# Altium PCB O_Flicker_V01_D0506.PcbDoc
Units mil, origin at the board's own origin, x right, y up, seen from the top; angles counter-clockwise.
Board outline 4527.56 x 3543.31 mil, 2 copper layers (Top Layer, Bottom Layer); 96 components, 75 nets, 276 pads, 3 vias.
Unrouted connection lines stored in the file: 146.
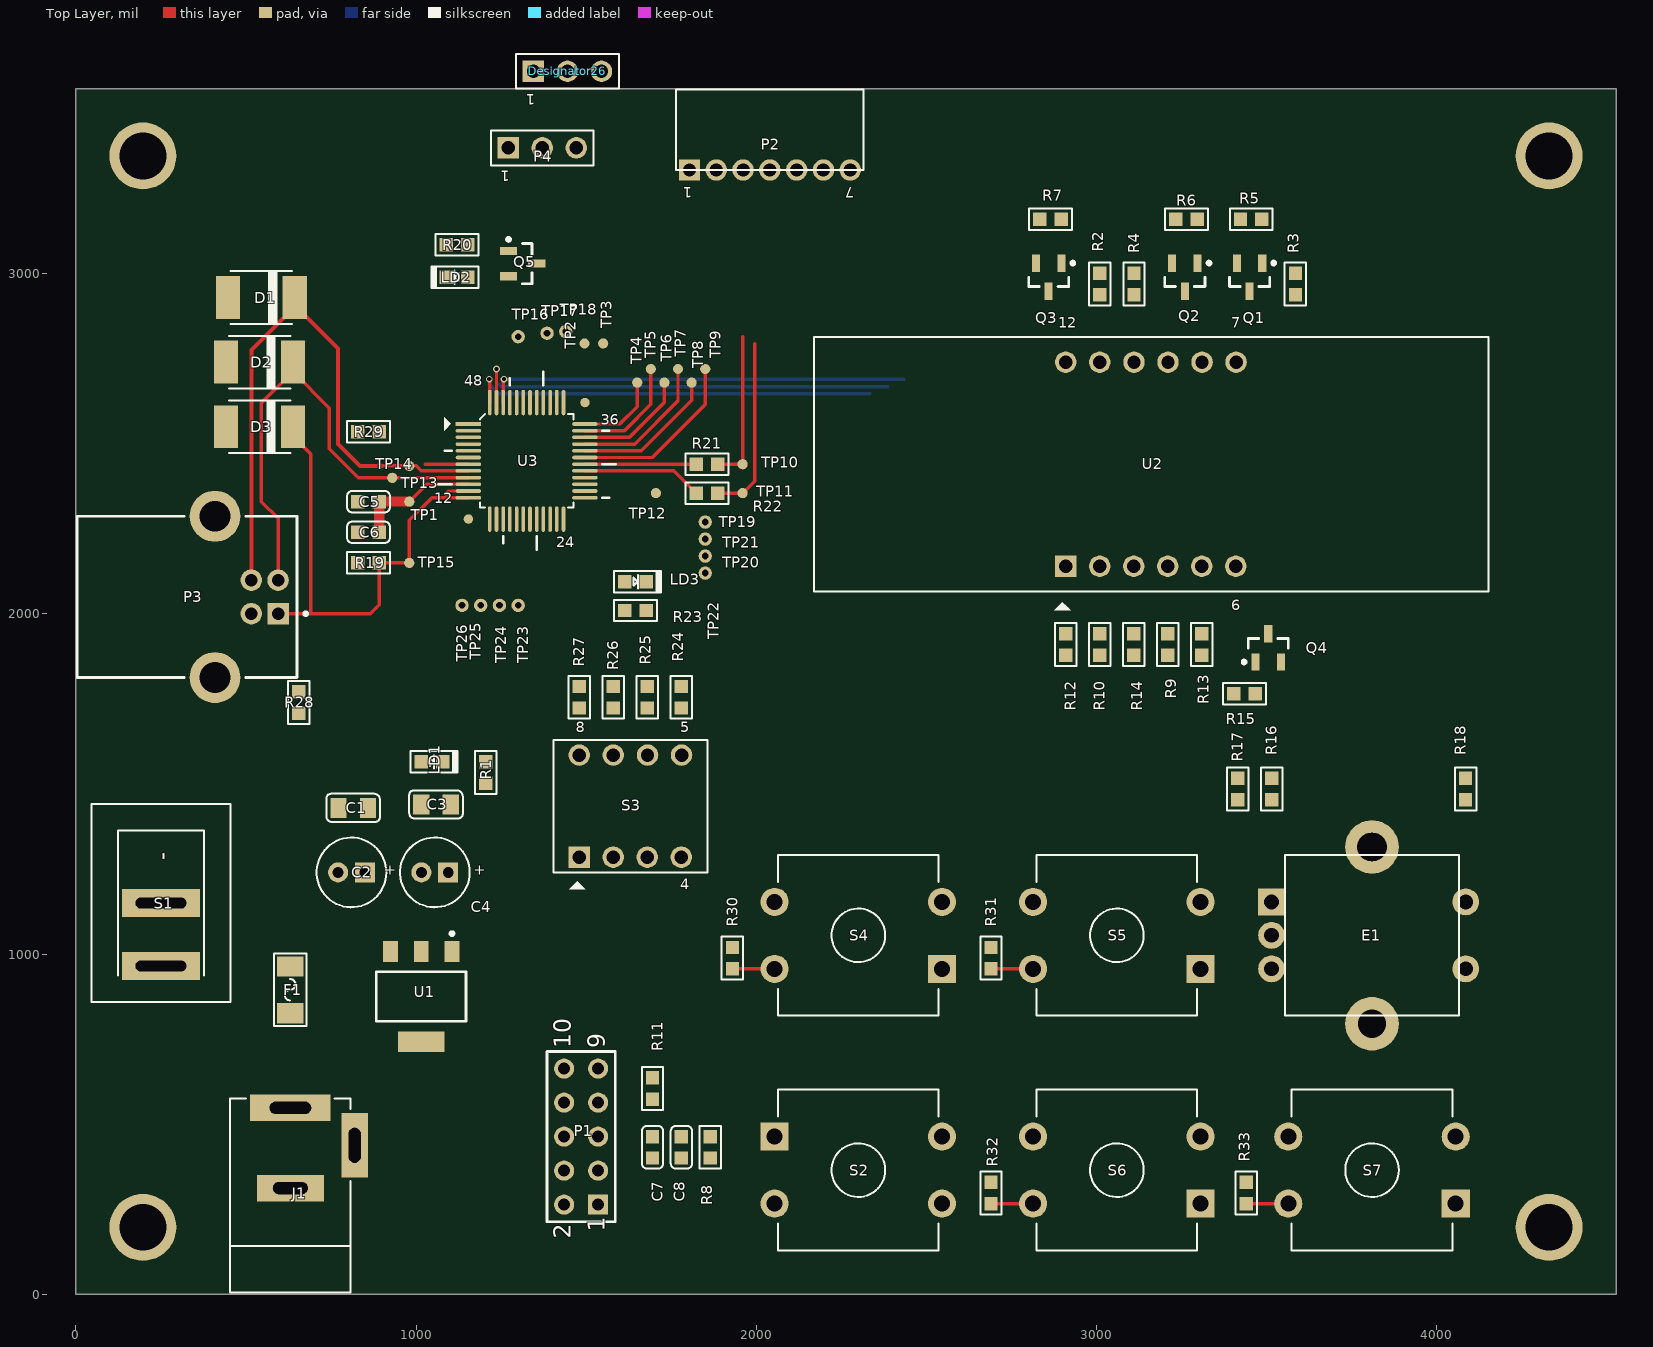
[diagram p0: Top Layer view]
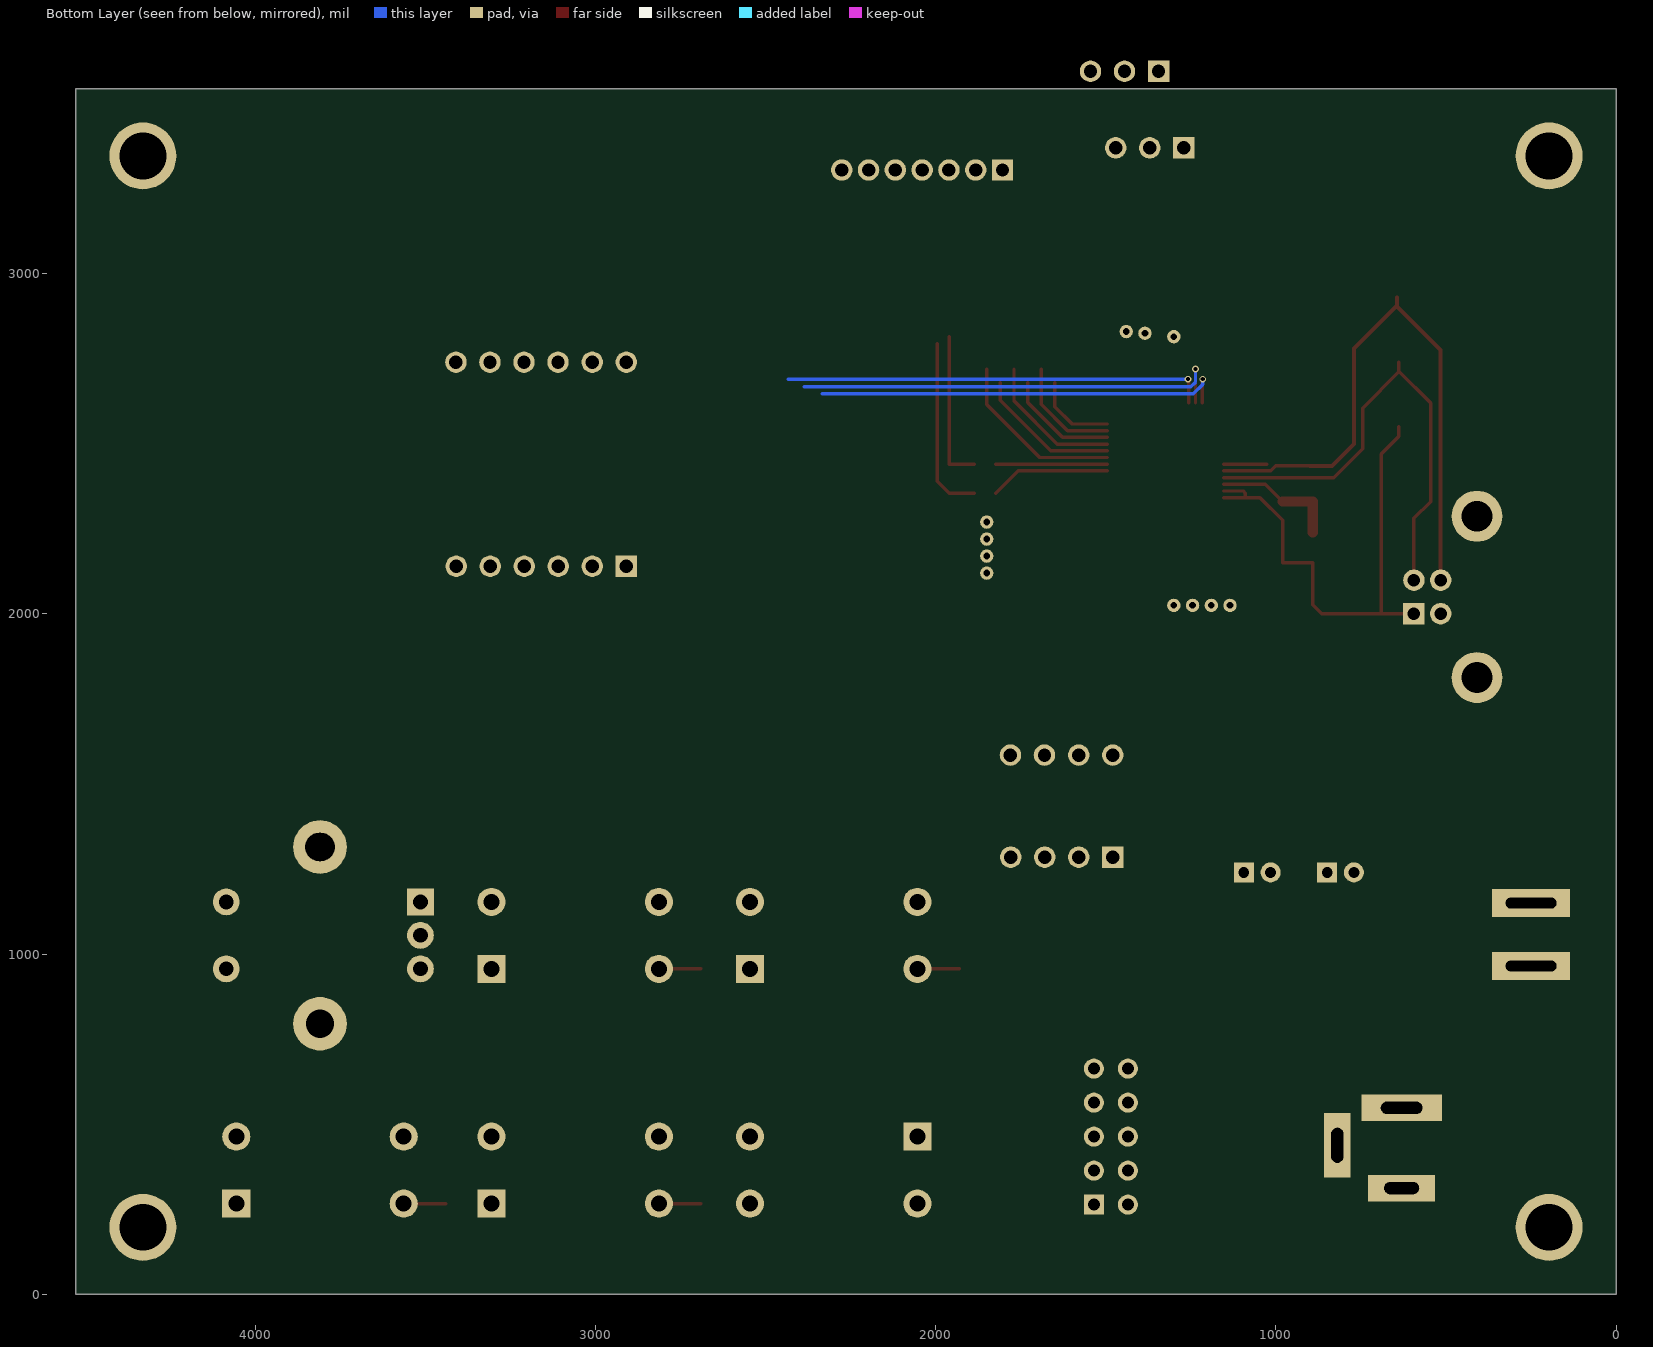
[diagram p1: Bottom Layer view, seen from below]

## Layer stack, top to bottom
Top Layer: signal copper 1.4
Dielectric: dielectric 12.6, FR-4, Dk 4.8
Bottom Layer: signal copper 1.4

## Board outline
0,0 4527.56,0 4527.56,3543.31 0,3543.31

## Design rules (kind name [scope] priority, off if disabled: settings)
Clearance [All] p1: gap=6
ComponentClearance [All] p1 off: gap=10 collisioncheckmode=3 verticalgap=10 showdistances=FALSE
FabricationTestPointUsage TestPointUsage [All] p1: valid=0 allowmultiple=FALSE
FabricationTestpoint Testpoint [(IsPad And (OnTopLayer Or OnBottomLayer))] p1: side=3 testpointundercomponent=TRUE minsize=40 maxsize=100 preferedsize=60 minholesize=0 maxholesize=40 preferedholesize=32 testpointgrid=1 allowsidetop=TRUE allowsidebottom=TRUE usegrid=TRUE gridtolerance=0.01
Height [All] p1 off: minheight=0 maxheight=1000 prefheight=500
HoleSize [All] p1: absolutevalues=TRUE maxlimit=400 minlimit=1 maxpercent=80.000 minpercent=20.000
PolygonConnect PolygonConnect_1 [IsVia or IsSMTPin] p1: connectstyle=Direct reliefconductorwidth=10 reliefentries=4 polygonreliefangle="90 Angle"
PolygonConnect [All] p2: connectstyle=Relief reliefconductorwidth=20 reliefentries=4 polygonreliefangle="90 Angle"
RoutingVias [All] p1: holewidth=30 width=40 viastyle="Through Hole" minholewidth=12 minwidth=20 maxholewidth=20 maxwidth=30
SilkscreenOverComponentPads [All] p1: minsilkscreentomaskgap=10
SolderMaskExpansion [All] p1: expansion=4
Width [All] p1: maxlimit=80 minlimit=10 preferedwidth=12
22 further rules are at their usual default settings.

## Components (designator, comment, footprint, x,y, rotation, side; value= is the part's Value field where it differs from the comment)
C1 "Cap" C0805 815,1430 r180 top
C2 "47uF/16V" CAP-5*2 810,1240 r180 top
C3 "Cap" C0805 1058.5,1440 r180 top
C4 "47uF/16V" CAP-5*2 1055,1240 r180 top
C5 "Cap Semi" C0603 860,2330 r180 top
C6 "Cap Semi" C0603 860,2240 r180 top
C7 "Cap Semi" C0603 1695,432 r90 top
C8 "Cap Semi" C0603 1780,432 r90 top
D1 "Diode" DO-214AA 545,2930 r0 top
D2 "Diode" DO-214AA 540,2740 r0 top
D3 "Diode" DO-214AA 540,2550 r0 top
Designator26 "Comment" CH3P\2.54-V 1445,3595 r180 top
E1 "DC12K24214" DC12K24214 3810,1055 r270 top
F1 "Fuse 2" F1206 630,895 r90 top
J1 "DC JACK 3P/2mm" DC-JACK 725,430 r0 top
LD1 "LED2" D0603 1046.5,1565 r0 top
LD2 "LED2" D0603 1120,2990 r180 top
LD3 "LED2" D0603 1645,2095 r0 top
P1 "Header 5X2H" HDR2X5 1535,263.5 r90 top
P2 "I2C" CH7P\2.0-H 2040,3305 r180 top
P3 "440119-1" 440119 555,2050 r180 top
P4 "Sensor" CH3P\2.54-V 1371,3370 r180 top
Q1 "MMBT3906" SOT23_N 3450,2990 r270 top
Q2 "MMBT3906" SOT23_N 3260,2990 r270 top
Q3 "MMBT3906" SOT23_N 2859.61,2990 r270 top
Q4 "MMBT3906" SOT23_N 3505,1900 r90 top
Q5 "2N7002" SOT23_N 1313,3030 r0 top
R1 "Res3" R0603 1205,1533.5 r90 top
R2 "Res3" R0603 3009.61,2970 r270 top
R3 "Res3" R0603 3585,2970 r270 top
R4 "Res3" R0603 3110.39,2970 r270 top
R5 "Res3" R0603 3455,3160 r0 top
R6 "Res3" R0603 3265,3160 r0 top
R7 "Res3" R0603 2865,3160 r0 top
R8 "Res3" R0603 1865,432 r270 top
R9 "Res3" R0603 3209.61,1910 r90 top
R10 "Res3" R0603 3009.61,1910 r90 top
R11 "Res3" R0603 1695,605 r90 top
R12 "Res3" R0603 2909.61,1910 r90 top
R13 "Res3" R0603 3309.61,1910 r90 top
R14 "Res3" R0603 3109.61,1910 r90 top
R15 "Res3" R0603 3435,1765 r0 top
R16 "Res3" R0603 3515,1485 r90 top
R17 "Res3" R0603 3415,1485 r90 top
R18 "Res3" R0603 4085,1485 r90 top
R19 "Res3" R0603 860,2150 r0 top
R20 "Res3" R0603 1120,3085 r0 top
R21 "Res3" R0603 1855,2440 r0 top
R22 "Res3" R0603 1855,2355 r0 top
R23 "Res3" R0603 1645,2010 r0 top
R24 "Res3" R0603 1780,1755 r90 top
R25 "Res3" R0603 1680,1755 r90 top
R26 "Res3" R0603 1580,1755 r90 top
R27 "Res3" R0603 1480,1755 r270 top
R28 "Res3" R0603 655,1740 r270 top
R29 "Res3" R0603 860,2535 r0 top
R30 "Res3" R0603 1930,988 r90 top
R31 "Res3" R0603 2690,988 r90 top
R32 "Res3" R0603 2690,298 r90 top
R33 "Res3" R0603 3440,298 r90 top
S1 "SW-SPST" SW-2P 250,1150 r270 top
S2 "SW-PB" SW-DIP4P-1 2300,365 r0 top
S3 "SW-DIP4" SW-8P\11.52*9.9 1630,1435 r0 top
S4 "SW-PB" SW-DIP4P-1 2300,1055 r180 top
S5 "SW-PB" SW-DIP4P-1 3060,1055 r180 top
S6 "SW-PB" SW-DIP4P-1 3060,365 r180 top
S7 "SW-PB" SW-DIP4P-1 3810,365 r180 top
TP1 "TP" TP30#1 1010,2330 r180 top
TP2 "TP" TP30#2 1495,2795 r180 top
TP3 "TP" TP30#2 1550,2795 r180 top
TP4 "TP" TP30#2 1650,2680 r180 top
TP5 "TP" TP30#3 1685,2720 r180 top
TP6 "TP" TP30#2 1730,2680 r180 top
TP7 "TP" TP30#2 1770,2720 r180 top
TP8 "TP" TP30#2 1810,2680 r180 top
TP9 "TP" TP30#2 1850,2720 r180 top
TP10 "TP" TP30#2 1960,2440 r180 top
TP11 "TP" TP30#2 1960,2355 r180 top
TP12 "TP" TP30#2 1705,2355 r180 top
TP13 "TP" TP30#2 930,2400 r180 top
TP14 "TP" TP30#1 1010,2435 r180 top
TP15 "TP" TP30#2 980,2150 r180 top
TP16 "TP" TP1 1300,2815 r180 top
TP17 "TP" TP1 1385,2825 r180 top
TP18 "TP" TP1 1440,2830 r180 top
TP19 "TP" TP1 1850,2270 r180 top
TP20 "TP" TP1 1850,2170 r180 top
TP21 "TP" TP1 1850,2220 r180 top
TP22 "TP" TP1 1850,2120 r180 top
TP23 "TP" TP1 1300,2025 r180 top
TP24 "TP" TP1 1245,2025 r180 top (schematic designator TP25)
TP25 "TP" TP1 1190,2025 r180 top
TP26 "TP" TP1 1135,2025 r180 top
U1 "LM1117-3.3" ZZ311 1015,875 r180 top
U2 "4-7SEG" SW-12P\50*19 3160,2440 r0 top
U3 "C8051F340" TQFP-48 1325,2450 r0 top

## Footprints (in the part's own frame and the unit in brackets; to place one, negate y for a bottom-side part, rotate by r counter-clockwise, add the part's x,y. Pads: shape width x height; smd on the part's side, far side on the other; paste and mask are expansions set on the pad)
440119 [mm] "Connector; USB1.1, Type B, Thru-Hole; 4 Position; Right Angle"
  rect 1.6x1.6 hole 0.92: 1(-1,1.25)
  round 1.6 hole 0.92: 2(-1,-1.25) 3(1,-1.25) 4(1,1.25)
  round 3.8 hole 2.3: 5(3.71,6.02) 6(3.71,-6.02)
  silkscreen extent -3.18,-6.02 13.99,6.02
C0603 [mm]
  rect 1x1 smd: 1(-0.8,0) 2(0.8,0)
  silkscreen extent -1.6,-0.8 1.6,0.8
C0805 [mm]
  rect 1.2x1.5 smd: 1(-1.1,0) 2(1.1,0)
  silkscreen extent -2,-1.05 2,1.05
CAP-5*2 [mm]
  rect 1.5x1.5 hole 0.8: 1(-1,0)
  round 1.5 hole 0.8: 2(1,0)
  silkscreen extent -2.6,-2.6 2.6,2.6
CH3P\2.54-V [mm]
  rect 1.6x1.6 hole 1: 1(2.54,0)
  round 1.6 hole 1: 2(0,0) 3(-2.54,0)
  silkscreen extent -3.84,-1.3 3.84,1.3
CH7P\2.0-H [mm]
  rect 1.6x1.6 hole 1: 1(6,0)
  round 1.6 hole 1: 2(4,0) 3(2,0) 4(0,0) 5(-2,0) 6(-4,0) 7(-6,0)
  silkscreen extent -7,-6 7,0
D0603 [mm]
  rect 1x1 smd: 1(-0.8,0) 2(0.8,0)
  silkscreen extent -1.6,-0.8 1.9,0.8
DC12K24214 [mm]
  round 4 hole 2.1 slot 2.2 at 90 deg: 0(-6.6,0)
  round 4 hole 2.1: 0(6.6,0)
  rect 2x2 hole 1.1: 1(-2.5,-7.5)
  round 2 hole 1.1: 2(0,-7.5) 3(2.5,-7.5) 4(-2.5,7) 5(2.5,7)
  silkscreen extent -6,-6.5 6,6.5
DC-JACK [mm]
  rect 6x2 hole 0.9 slot 3.1 at 0 deg: 1(-2.4,3)
  rect 2x4.8 hole 0.9 slot 2.6 at 90 deg: 2(2.4,0.2)
  rect 5x2 hole 0.9 slot 2.6 at 0 deg: 3(-2.4,-3)
  silkscreen extent -6.9,-10.8 2.1,3.7
DO-214AA [mm]
  rect 1.8x3.2 smd: 1(-2.5,0) 2(2.5,0)
  silkscreen extent -2.29,-1.97 2.29,2
F1206 [mm]
  rect 1.5x2 smd paste+0: 1(-1.75,0) 2(1.75,0)
  silkscreen extent -2.7,-1.2 2.7,1.2
HDR2X5 [mm] "Connector; Header; 5x2 Position"
  rect 1.5x1.5 hole 0.9: 1(0,0)
  round 1.5 hole 0.9: 2(0,2.54) 3(2.54,0) 4(2.54,2.54) 5(5.08,0) 6(5.08,2.54) 7(7.62,0) 8(7.62,2.54) 9(10.16,0) 10(10.16,2.54)
  silkscreen extent -1.27,-1.27 11.43,3.81
R0603 [mm]
  rect 1x1 smd: 1(-0.8,0) 2(0.8,0)
  silkscreen extent -1.6,-0.8 1.6,0.8
SOT23_N [mm] "SOT23, 3-Leads, Body 2.9x1.3mm, Pitch 0.95mm, Lead Span 2.3mm, IPC Medium Density"
  rect 1.3x0.6 smd: 1(-1.05,0.95) 2(-1.05,-0.95) 3(1.05,0)
  silkscreen extent -1.17,-1.5 0.7,1.93, body extent -0.7,-1.5 0.7,1.5, height 1.1
SW-2P [mm]
  rect 2.1x5.8 hole 0.8 slot 3.8 at 90 deg: 1(4.7,0) 2(0,0)
  silkscreen extent -7.4,-5.2 7.4,5.2
SW-8P\11.52*9.9 [mm]
  rect 1.6x1.6 hole 1: 1(-3.82,-3.81)
  round 1.6 hole 1: 2(-1.28,-3.81) 3(1.26,-3.81) 4(3.8,-3.81) 5(3.82,3.81) 6(1.28,3.81) 7(-1.28,3.81) 8(-3.82,3.81)
  silkscreen extent -5.76,-6.2 5.76,4.95
SW-12P\50*19 [mm]
  rect 1.6x1.6 hole 1: 1(-6.36,-7.62)
  round 1.6 hole 1: 2(-3.82,-7.62) 3(-1.28,-7.62) 4(1.26,-7.62) 5(3.8,-7.62) 6(6.34,-7.62) 7(6.36,7.62) 8(3.82,7.62) 9(1.28,7.62) 10(-1.26,7.62) 11(-3.82,7.62) 12(-6.36,7.62)
  silkscreen extent -25.15,-10.9 25.2,9.5
SW-DIP4P-1 [mm]
  rect 2.1x2.1 hole 1.2: 1(-6.25,2.5)
  round 2.1 hole 1.2: 2(6.25,2.5) 3(-6.25,-2.5) 4(6.25,-2.5)
  silkscreen extent -6,-6 6,6
TP1 [mm]
  round 1 hole 0.5: 1(0,0)
TP30#1 [mm]
  round 0.76 smd: 1(0.762,0)
TP30#2 [mm]
  round 0.76 smd: 1(0,0)
TP30#3 [mm]
  round 0.76 smd: 1(-0.127,0)
TQFP-48 [mm] "64-Pin Thin Quad Flat Pack 0.5 mm Pitch, IPC High Density"
  rect 1.9x0.27 smd: 1(-4.35,2.75)
  oval 1.9x0.27 smd: 2(-4.35,2.25) 3(-4.35,1.75) 4(-4.35,1.25) 5(-4.35,0.75) 6(-4.35,0.25) 7(-4.35,-0.25) 8(-4.35,-0.75) 9(-4.35,-1.25) 10(-4.35,-1.75) 11(-4.35,-2.25) 12(-4.35,-2.75) 25(4.35,-2.75) 26(4.35,-2.25) 27(4.35,-1.75) 28(4.35,-1.25) 29(4.35,-0.75) 30(4.35,-0.25) 31(4.35,0.25) 32(4.35,0.75) 33(4.35,1.25) 34(4.35,1.75) 35(4.35,2.25) 36(4.35,2.75)
  oval 0.27x1.9 smd: 13(-2.75,-4.35) 14(-2.25,-4.35) 15(-1.75,-4.35) 16(-1.25,-4.35) 17(-0.75,-4.35) 18(-0.25,-4.35) 19(0.25,-4.35) 20(0.75,-4.35) 21(1.25,-4.35) 22(1.75,-4.35) 23(2.25,-4.35) 24(2.75,-4.35) 37(2.75,4.35) 38(2.25,4.35) 39(1.75,4.35) 40(1.25,4.35) 41(0.75,4.35) 42(0.25,4.35) 43(-0.25,4.35) 44(-0.75,4.35) 45(-1.25,4.35) 46(-1.75,4.35) 47(-2.25,4.35) 48(-2.75,4.35)
  round 0.7 smd mask+0.25: a(-4.35,-4.35) a(4.35,4.35)
  silkscreen extent -6.6,-6.65 6.65,6.65
ZZ311 [mm] "SOT-223/SC-73; 4 Leads; Body 6.7 x 7.3 mm, inc. leads (LxW max)"
  rect 1.1x1.55 smd: 1(-2.3,-3.375) 2(0,-3.375) 3(2.3,-3.375)
  rect 3.45x1.55 smd: 4(0,3.375)
  silkscreen extent -3.35,-4.82 3.35,1.85

## Part data
C1 C3: "Capacitor"
C2 C4: library part Cap2, "Capacitor"
C5 C6 C7 C8: "Capacitor (Semiconductor SIM Model)"
D1 D2 D3: "Default Diode"
E1: "Rotary Encoder+Push Button"
F1: "Fuse"
J1: library part PWR2.5
LD1 LD2 LD3: "Typical RED, GREEN, YELLOW, AMBER GaAs LED"
P1: "Header, 5-Pin, Dual row, Right Angle"
P2: library part S7B-PH-K-S, "Header, 7-Pin, Right Angle"
P3: "USB 1.1, Right Angle, Thru-Hole, B Type, Receptacle, 4 Position, Beige"
P4: library part S3B-PH-K-S, "Header, 7-Pin, Right Angle"
Q1 Q2 Q3 Q4: "PNP Switching Transistor"
Q5: "N-Channel Enhancement Mode Vertical DMOS FET"
R1 R2 R3 R4 R5 R6 R7 R8 R9 R10 R11 R12 R13 R14 R15 R16 R17 R18 R19 R20 R21 R22 R23 R24 R25 R26 R27 R28 R29 R30 R31 R32 R33: "Resistor"
S1: "Single-Pole, Single-Throw Switch"
S2 S4 S5 S6 S7: "Switch"
S3: "DIP Switch"
U1: "800mA and 1A Low Dropout Positive Regulator 2.85V, 3.3V, 5V, and Adjustable"
U2: library part "7-SEG LED Display", "¥"
U3: "Silicon Lab - Full Speed USB Flash MCU"

## Free pads (board coordinates)
  round 196.85 hole 137.8: 0(196.85,196.85) 0(196.85,3346.46) 0(4330.71,196.85) 0(4330.71,3346.46)

## Via types
v1: diameter 20, hole 12, Top Layer to Bottom Layer, 3 vias

## Nets (pads, with @x,y where several pads share a name; then routed paths per layer and width w, separated by ;. In a path a pad name is that pad's centre, name@x,y a point inside that pad or via, vN(x,y) a via of type N, cw(c..) or ccw(c..) an arc to the next point about the centre after c; other vN are vias at no path point)
GND: C1.1 C2.1 C3.1 C4.1 C5.2 C6.2 C7.1 C8.1 D1.1 D2.1 D3.1 E1.2 E1.5 J1.2 J1.3 P1.2 P1.3 P1.9 P2.6 P4.3 R1.1 R20.2 R23.1 R28.1 R29.1 S2.2 S3.1 S3.2 S3.3 S3.4 S4.1 S5.1 S6.1 S7.1 U1.1
NetC7_2: C7.2 C8.2 P1.5 R8.1 R11.1 S2.1
NetD3_2: D3.2 P3.1 R19.2 TP15.1 U3.11 U3.12 | length 1496.4
  Top Layer w10: P3.1 690,2000.79 ; D3.2 638.43,2521.57 690,2470 690,2000.79 ; U3.12 1090,2341.73 ; U3.11 1096.42,2361.42 1090,2355 1090,2341.73 ; 690,2000.79 865.79,2000.79 891.5,2026.5 R19.2 TP15.1 980,2275 1046.73,2341.73 1090,2341.73
NetF1_1: F1.1 J1.1
NetF1_2: F1.2 S1.1
NetLD1_2: LD1.2 R1.2
NetLD2_1: LD2.1 Q5.2
NetLD2_2: LD2.2 R20.1
NetLD3_1: LD3.1 U3.23
NetLD3_2: LD3.2 R23.2
NetP1_4: P1.4 U3.14
NetP1_7: P1.7 R11.2 U3.13
NetP3_4: P3.4 P3.5 P3.6 R28.2
NetQ1_1: Q1.1 R5.2
NetQ1_3: Q1.3 U2.8
NetQ2_1: Q2.1 R6.2
NetQ2_3: Q2.3 U2.9
NetQ3_1: Q3.1 R7.2
NetQ3_3: Q3.3 U2.12
NetQ4_1: Q4.1 R15.2
NetQ4_3: Q4.3 U2.6
NetQ5_3: Q5.3 U3.41
NetR2_1: R2.1 U3.6
NetR2_2: R2.2 U2.11
NetR3_1: R3.1 U3.5
NetR3_2: R3.2 U2.7
NetR4_1: R4.1 U3.1
NetR4_2: R4.2 U2.10
NetR5_1: R5.1 U3.45
NetR6_1: R6.1 U3.44
NetR7_1: R7.1 U3.43
NetR9_1: R9.1 U3.4
NetR9_2: R9.2 U2.4
NetR10_1: R10.1 U3.3
NetR10_2: R10.2 U2.2
NetR12_1: R12.1 U3.2
NetR12_2: R12.2 U2.1
NetR13_1: R13.1 U3.48 | length 1214.7
  Top Layer w10: U3.48 v1@1216.73,2690
  Bottom Layer w10: v1(1215,2690) 1215,2674.42 1242.42,2647 2334,2647
NetR13_2: R13.2 U2.5
NetR14_1: R14.1 U3.47 | length 1293.4
  Top Layer w10: U3.47 v1(1236.42,2720)
  Bottom Layer w10: v1(1236.42,2720) 1236.42,2681.58 1250,2668 2387,2668
NetR14_2: R14.2 U2.3
NetR15_1: R15.1 U3.46 | length 1244.7
  Top Layer w10: U3.46 v1@1256.1,2690
  Bottom Layer w10: v1(1258,2690) 2434,2690
NetR21_1: R21.1 U3.30 | length 327.3
  Top Layer w10: U3.30 1823.35,2440.16 R21.1
NetR22_1: R22.1 U3.29 | length 354.4
  Top Layer w10: U3.29 1758.03,2420.47 R22.1
NetR24_1: R24.1 S3.5 U3.22
NetR25_1: R25.1 S3.6 U3.21
NetR26_1: R26.1 S3.7 U3.20
NetR27_2: R27.2 S3.8 U3.19
NetR29_2: R29.2 U3.7 | length 127.4
  Top Layer w10: 1026.34,2440.16 U3.7
PORT1.4: TP16.1 U3.42
PORT1.6: TP17.1 U3.40
PORT1.7: TP18.1 U3.39
PORT3.2: TP19.1 U3.28
PORT3.4: TP20.1 U3.26
PORT3.5: TP21.1 U3.25
PORT3.6: TP22.1 U3.24
PORT4.4: TP23.1 U3.18
PORT4.5: TP24.1 U3.17
PORT4.6: TP25.1 U3.16
PORT4.7: TP26.1 U3.15
PRESS: E1.4 R18.1 TP5.1 U3.35 | length 329.8
  Top Layer w10: U3.35 1612.58,2538.58 1690,2616 TP5.1
ROTARY_C_CW: E1.3 R17.1 TP3.1 U3.37
ROTARY_CW: E1.1 R16.1 TP2.1 U3.38
SCL: P2.4 R22.2 TP11.1 | length 528
  Top Layer w10: R22.2 TP11.1 1995,2390 1995,2795
SDA: P2.3 R21.2 TP10.1 | length 448.5
  Top Layer w10: R21.2 TP10.1 1960,2815
SENSOR: P4.2 TP4.1 U3.36 | length 245.8
  Top Layer w10: U3.36 1599.27,2558.27 1650,2609 TP4.1
SW_DOWN: R30.1 S4.2 TP9.1 U3.31 | length 646.7
  Top Layer w10: U3.31 1694.34,2459.84 1850,2615.5 TP9.1 ; R30.1 1930.07,956.57 S4.2
SW_READ: R33.1 S7.2 TP6.1 U3.34 | length 458.7
  Top Layer w10: U3.34 1627.4,2518.9 1730,2621.5 TP6.1 ; R33.1 3440.07,266.57 S7.2
SW_UP: R31.1 S5.2 TP8.1 U3.32 | length 551.2
  Top Layer w10: U3.32 1661.53,2479.53 1810,2628 TP8.1 ; R31.1 2690.07,956.57 S5.2
SW_WRITE: R32.1 S6.2 TP7.1 U3.33 | length 543.6
  Top Layer w10: U3.33 1642.21,2499.21 1770,2627 TP7.1 ; R32.1 2690.07,266.57 S6.2
TST_PGM: P2.5 TP12.1 U3.27
USB_D+: D1.2 P3.3 TP14.1 U3.8 | length 1759.4
  Top Layer w10: 900,2435 TP14.1 1000.47,2435 1015,2420.47 U3.8
  Top Layer w11.81: P3.3 515.63,2775.63 643.43,2903.43 D1.2 ; D1.2@643.43,2906.57 770,2780 770,2500 835,2435 900,2435
USB_D-: D2.2 P3.2 TP13.1 U3.9 | length 1414.9
  Top Layer w10: P3.2 594.37,2280.63 545,2330 545,2620 638.43,2713.43 D2.2 ; D2.2@638.43,2711.57 745,2605 745,2485 830,2400 TP13.1 930.79,2400.79 U3.9
VCC: C1.2 C2.2 P4.1 Q1.2 Q2.2 Q3.2 Q4.2 Q5.1 R19.1 S1.2 U1.3
VDD: C3.2 C4.2 C5.1 C6.1 LD1.1 P1.1 R8.2 R16.2 R17.2 R18.2 R24.2 R25.2 R26.2 R27.1 R30.2 R31.2 R32.2 R33.2 TP1.1 U1.2 U1.4 U3.10 | length 373.4
  Top Layer w10: TP1.1 1031.1,2381.1 U3.10
  Top Layer w30: C6.1 C5.1 TP1.1
pads on no net: Designator26.1 Designator26.2 Designator26.3 E1.0 P1.6 P1.8 P1.10 P2.1 P2.2 P2.7 S2.3 S2.4 S4.3 S4.4 S5.3 S5.4 S6.3 S6.4 S7.3 S7.4 U3.a

## Silkscreen, mask and mechanical layers (free items; w line width, h text height)
Mechanical 1:
  the board outline again, w0.39

## Text inside footprints (layer, text, board x,y; h text height)
C2: Top Overlay "+" at 941.61,1259.68 h31.5 r180
C4: Top Overlay "+" at 1204.61,1259.68 h31.5 r180
Designator26: Top Overlay "1" at 1349.72,3528.07 h31.5 r180
P1: Top Overlay "10" at 1455,723.5 h50 r90; Top Overlay "9" at 1555,723.5 h50 r90; Top Overlay "1" at 1555,183.5 h50 r90; Top Overlay "2" at 1455,163.5 h50 r90
P2: Top Overlay "1" at 1811.65,3253.82 h31.5 r180; Top Overlay "7" at 2288.03,3253.82 h31.5 r180
P4: Top Overlay "1" at 1275.72,3303.07 h31.5 r180
S1: Top Overlay "-" at 275.59,1275.98 h47.24 r90
S3: Top Overlay "4" at 1776.85,1190.91 h31.5; Top Overlay "5" at 1776.85,1651.54 h31.5; Top Overlay "8" at 1469.76,1651.54 h31.5
U2: Top Overlay "12" at 2887.95,2841.57 h31.5; Top Overlay "7" at 3396.22,2841.57 h31.5; Top Overlay "6" at 3396.22,2010.87 h31.5
U3: Top Overlay "48" at 1142,2670 h31.5; Top Overlay "12" at 1053.35,2325.98 h31.5; Top Overlay "24" at 1411.61,2196.06 h31.5; Top Overlay "36" at 1543.5,2556.3 h31.5